# EAGLE board stm32-discovery (EAGLE 7.3.0)
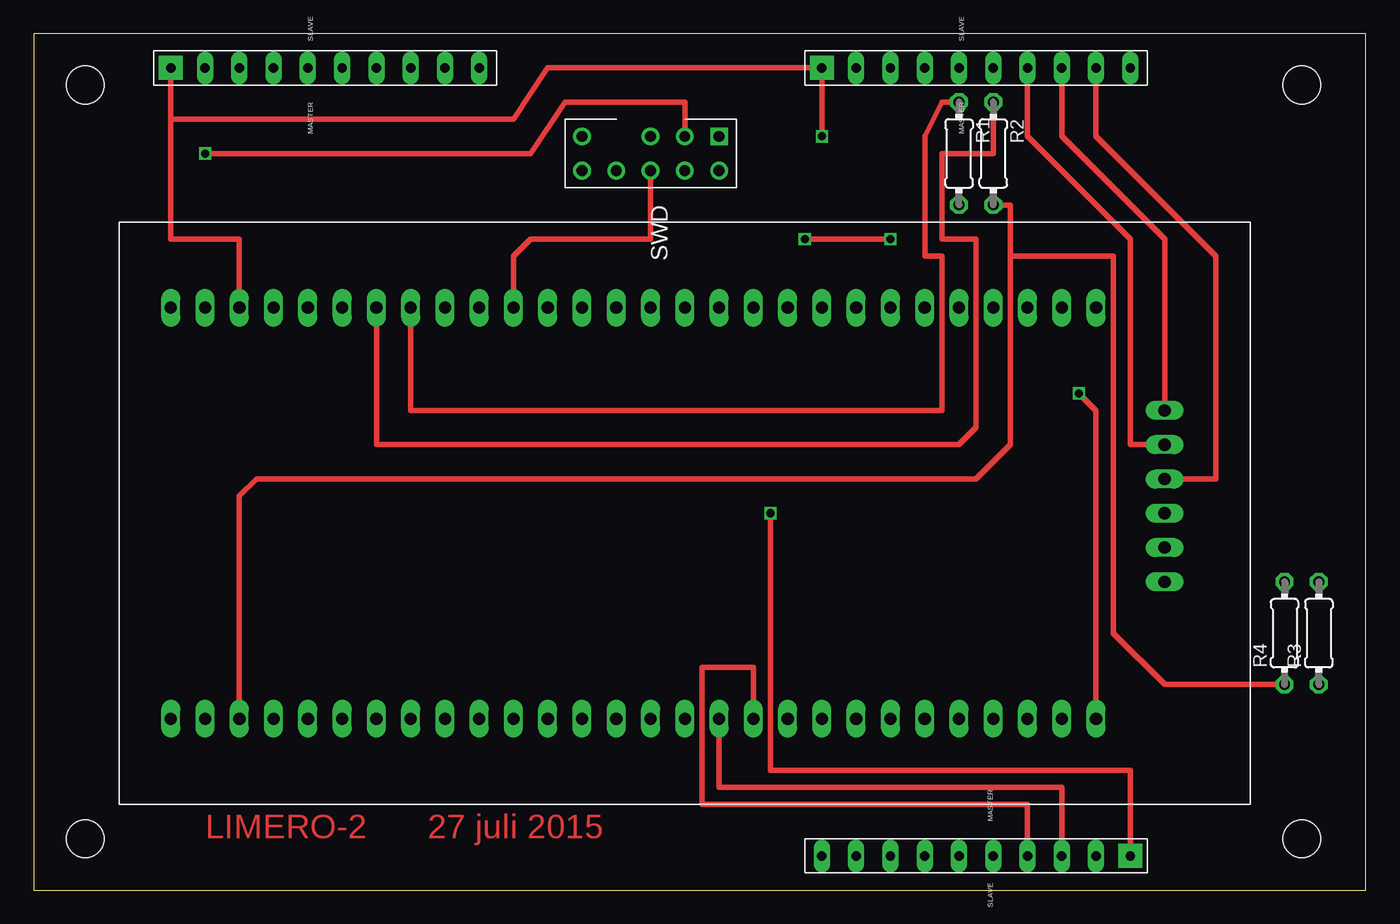
[diagram p0: board, top side]
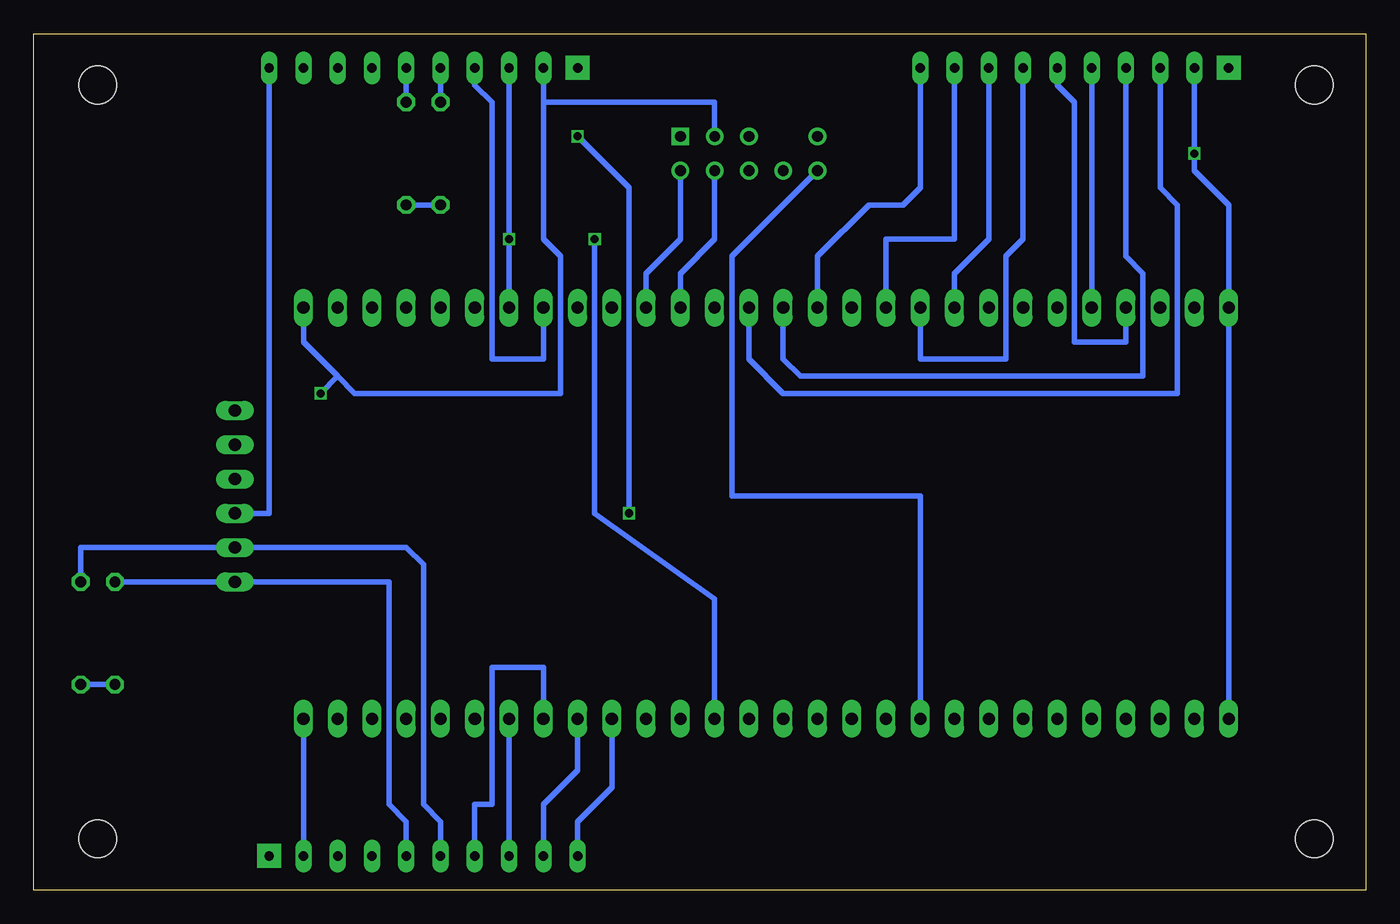
[diagram p1: board, bottom side, seen from below]

Size 98.73 x 63.49 mm. Coordinates in mm from the lower left corner, seen from the top.
Outline: 0,0 98.73,0 98.73,63.49 0,63.49 0,0
Copper layers (1*16): Top 0.035mm / dielectric 1.5mm / Bottom 0.035mm
Design rules "dirt_cheap_dirty_boards.v1": minimum track width 5mil, minimum drill 12mil, track to track 5mil, track to pad 5mil, pad to pad 5mil, via to via 5mil, smd to smd 0mil, copper to edge 10mil, drill to drill 10mil, minimum pad ring 10mil, minimum via ring 6mil, stop-mask expansion 2mil, vias tented up to drill 25mil, thermal gap 10mil
Holes 2.8 mm at 3.81,3.81 93.98,3.81 93.98,59.69 3.81,59.69

## Footprints (pad centres in the part's own frame; a part is rotated, then mirrored left to right if it is on the bottom)
0204/7 = drill 0.813 octagon: 1 -3.81,0; 2 3.81,0
STM32_DISCOVERY = drill 0.9 long: 3V3 -15.24,29.21; 5V 15.24,29.21; BOOT 15.24,21.59; GND@1 -15.24,34.29; GND@2 15.24,34.29; GND@3 -15.24,-34.29; GND@4 15.24,-34.29; NC@1 -15.24,31.75; NC@2 15.24,31.75; PA0 -15.24,-1.27; PA1 -15.24,-3.81; PA2 -15.24,-6.35; PA3 -15.24,-8.89; PA4 -15.24,-11.43; PA5 -15.24,-13.97; PA6 -15.24,-16.51; PA7 -15.24,-19.05; PA8 15.24,-21.59; PA9 15.24,-19.05; PA10 15.24,-16.51; PA11 15.24,-13.97; PA12 15.24,-11.43; PA13 15.24,-8.89; PA14 15.24,-6.35; PA15 15.24,-3.81; PB0 -15.24,-26.67; PB1 -15.24,-29.21; PB2 -15.24,-31.75; PB3 15.24,8.89; PB4 15.24,11.43; PB5 15.24,13.97; PB6 15.24,16.51; PB7 15.24,19.05; PB8 15.24,24.13; PB9 15.24,26.67; PB10 -5.08,-39.37; PB11 -2.54,-39.37; PB12 0,-39.37; PB13 2.54,-39.37; PB14 5.08,-39.37; PB15 7.62,-39.37; PC0 -15.24,8.89; PC1 -15.24,6.35; PC2 -15.24,3.81; PC3 -15.24,1.27; PC4 -15.24,-21.59; PC5 -15.24,-24.13; PC6 15.24,-31.75; PC7 15.24,-29.21; PC8 15.24,-26.67; PC9 15.24,-24.13; PC10 15.24,-1.27; PC11 15.24,1.27; PC12 15.24,3.81; PC13 -15.24,24.13; PC14 -15.24,21.59; PC15 -15.24,19.05; PD0 -15.24,16.51; PD1 -15.24,13.97; PD2 15.24,6.35; RST -15.24,11.43; VBAT -15.24,26.67
SPI_BUS = drill 0.7 pad 1.778 square: +5V 0,0 | drill 0.7 long: CS 0,22.86; GND 0,2.54; MISO 0,15.24; MOSI 0,17.78; RXD 0,7.62; SCK 0,20.32; SCL 0,10.16; SDA 0,12.7; TXD 0,5.08
SWD = drill 0.8 square: +VCC 0,10.16 | drill 0.8: GND 0,7.62; GND1 0,5.08; GND2 0,0; N/U 2.54,2.54; RST 2.54,0; SWCLK 2.54,7.62; SWDIO 2.54,10.16; SWO 2.54,5.08

## Placement (x,y rotation side)
R1  [0204/7]  68.58,54.61 270 top
R2  [0204/7]  71.12,54.61 270 top
R3  [0204/7]  95.25,19.05 90 top
R4  [0204/7]  92.71,19.05 90 top
U$1  STM32_DISCOVERY  [STM32_DISCOVERY]  44.45,27.94 90 top
U$2  SPI_BUS  [SPI_BUS]  58.42,60.96 270 top
U$3  SPI_BUS  [SPI_BUS]  81.28,2.54 90 top
U$4  SWD  [SWD]  40.64,55.88 270 top
U$5  SPI_BUS  [SPI_BUS]  10.16,60.96 270 top

## Library data of the parts
R1-R4 = rcl
U$1 = stm32_discovery
U$2-U$5 = lieven

## Nets
N$1: U$1.PA2 U$3.TXD
N$2: U$1.PA3 U$3.RXD
N$3: U$1.GND@1 U$1.GND@2 U$1.GND@3 U$1.GND@4 U$2.GND U$3.GND U$4.GND U$5.GND
N$4: U$1.5V U$2.+5V U$3.+5V U$5.+5V
N$5: U$1.PA4 U$3.CS
N$6: U$1.PA5 U$3.SCK
N$7: U$1.PA6 U$3.MISO
N$8: U$1.PA7 U$3.MOSI
N$9: R4.2 U$1.PB10 U$3.SCL
N$10: R3.2 U$1.PB11 U$3.SDA
N$11: U$1.PA1 U$1.PA9 U$2.TXD
N$12: U$1.PA10 U$2.RXD
N$13: U$1.PB12 U$2.CS
N$14: U$1.PB13 U$2.SCK
N$15: U$1.PB14 U$2.MISO
N$16: U$1.PB15 U$2.MOSI
N$17: R1.1 U$1.PB6 U$2.SCL
N$18: R2.1 U$1.PB7 U$2.SDA
N$19: U$1.PA13 U$4.SWDIO
N$20: U$1.PA14 U$4.SWCLK
N$21: U$1.RST U$4.RST
N$22: U$1.PB3 U$4.SWO U$5.SCK
N$23: U$1.PB8 U$5.SCL
N$24: U$1.PB9 U$5.SDA
N$25: U$1.PC10 U$5.TXD
N$26: U$1.PC11 U$5.RXD
N$27: U$1.PB4 U$5.MISO
N$28: U$1.PB5 U$5.MOSI
N$29: U$1.PC12 U$5.CS
VCC: R1.2 R2.2 R3.1 R4.1 U$1.3V3

## Tracks (layer width: path | path; a pad name or v marks a point on that pad's centre or on a via)
N$1
  Top 0.406: U$1.PA2 50.8,7.62 76.2,7.62 U$3.TXD
N$2
  Top 0.406: U$3.RXD 73.66,6.35 49.53,6.35 49.53,16.51 53.34,16.51 U$1.PA3
N$3  (via drill 0.6)
  Top 0.406: v12.7,54.61 36.83,54.61 39.37,58.42 48.26,58.42 U$4.GND | U$1.GND@3 78.74,35.56 v77.47,36.83
  Bottom 0.406: U$3.GND U$1.GND@3 | U$5.GND v12.7,54.61 12.7,53.34 10.16,50.8 U$1.GND@2 U$1.GND@1 | 60.96,58.42 60.96,48.26 59.69,46.99 59.69,36.83 74.93,36.83 76.2,38.1 | 76.2,38.1 78.74,40.64 U$1.GND@4 | U$2.GND 60.96,58.42 | 60.96,58.42 48.26,58.42 U$4.GND | v77.47,36.83 76.2,38.1
N$4  (via drill 0.6)
  Top 0.406: 10.16,57.15 35.56,57.15 38.1,60.96 U$2.+5V v58.42,55.88 | 10.16,57.15 10.16,48.26 15.24,48.26 U$1.5V | U$5.+5V 10.16,57.15 | U$3.+5V 81.28,8.89 54.61,8.89 v54.61,27.94
  Bottom 0.406: v54.61,27.94 54.61,52.07 v58.42,55.88
N$5
  Bottom 0.406: U$1.PA4 55.88,7.62 58.42,5.08 U$3.CS
N$6
  Bottom 0.406: U$1.PA5 58.42,8.89 60.96,6.35 U$3.SCK
N$7
  Bottom 0.406: U$3.MISO 66.04,6.35 64.77,6.35 64.77,16.51 60.96,16.51 U$1.PA6
N$8
  Bottom 0.406: U$1.PA7 U$3.MOSI
N$9
  Bottom 0.406: U$3.SCL 71.12,5.08 72.39,6.35 72.39,22.86 U$1.PB10 R4.2
N$10
  Bottom 0.406: U$3.SDA 68.58,5.08 69.85,6.35 69.85,24.13 71.12,25.4 U$1.PB11 95.25,25.4 R3.2
N$11  (via drill 0.6)
  Top 0.406: v57.15,48.26 v63.5,48.26
  Bottom 0.406: U$2.TXD v63.5,48.26 U$1.PA9 | U$1.PA1 48.26,21.59 57.15,27.94 v57.15,48.26
N$12
  Bottom 0.406: U$2.RXD 66.04,59.69 64.77,58.42 64.77,39.37 60.96,39.37 U$1.PA10
N$13
  Bottom 0.406: U$2.CS 81.28,27.94 U$1.PB12
N$14
  Top 0.406: U$2.SCK 78.74,55.88 87.63,46.99 87.63,30.48 U$1.PB13
N$15
  Top 0.406: U$2.MISO 73.66,55.88 81.28,48.26 81.28,33.02 U$1.PB14
N$16
  Top 0.406: U$2.MOSI 76.2,55.88 83.82,48.26 U$1.PB15
N$17
  Top 0.406: U$1.PB6 27.94,35.56 67.31,35.56 67.31,46.99 66.04,46.99 66.04,55.88 67.31,58.42 R1.1
  Bottom 0.406: R1.1 U$2.SCL
N$18
  Top 0.406: U$1.PB7 25.4,33.02 68.58,33.02 69.85,34.29 69.85,48.26 67.31,48.26 67.31,54.61 71.12,54.61 R2.1
  Bottom 0.406: U$2.SDA R2.1
N$19
  Bottom 0.406: U$4.SWDIO 50.8,48.26 53.34,45.72 U$1.PA13
N$20
  Bottom 0.406: U$4.SWCLK 48.26,48.26 50.8,45.72 U$1.PA14
N$21
  Bottom 0.406: U$4.RST 46.99,46.99 46.99,29.21 33.02,29.21 U$1.RST
N$22
  Top 0.406: U$4.SWO 45.72,48.26 36.83,48.26 35.56,46.99 U$1.PB3
  Bottom 0.406: U$1.PB3 35.56,48.26 30.48,48.26 U$5.SCK
N$23
  Bottom 0.406: U$1.PB8 U$5.SCL
N$24
  Bottom 0.406: U$5.SDA 22.86,59.69 21.59,58.42 21.59,40.64 17.78,40.64 U$1.PB9
N$25
  Bottom 0.406: U$5.TXD 15.24,52.07 13.97,50.8 13.97,36.83 43.18,36.83 45.72,39.37 U$1.PC10
N$26
  Bottom 0.406: U$5.RXD 17.78,46.99 16.51,45.72 16.51,38.1 41.91,38.1 43.18,39.37 U$1.PC11
N$27
  Bottom 0.406: U$1.PB4 33.02,39.37 26.67,39.37 26.67,46.99 25.4,48.26 U$5.MISO
N$28
  Bottom 0.406: U$1.PB5 30.48,45.72 27.94,48.26 U$5.MOSI
N$29
  Bottom 0.406: U$1.PC12 40.64,46.99 36.83,50.8 34.29,50.8 33.02,52.07 U$5.CS
VCC
  Top 0.406: U$1.3V3 15.24,29.21 16.51,30.48 69.85,30.48 72.39,33.02 72.39,46.99 | 72.39,46.99 72.39,50.8 R2.2 | R4.1 83.82,15.24 80.01,19.05 80.01,46.99 72.39,46.99
  Bottom 0.406: R2.2 R1.2 | R4.1 R3.1

## Text on the board
Top: LIMERO-2 | 27 juli 2015